# Altium PCB HVPCB_Rev2.PcbDoc
Units mm, origin at the board's own origin, x right, y up, seen from the top; angles counter-clockwise.
Board outline 175 x 100 mm, 2 copper layers (Top Layer, Bottom Layer); 98 components, 54 nets, 242 pads, 147 vias.
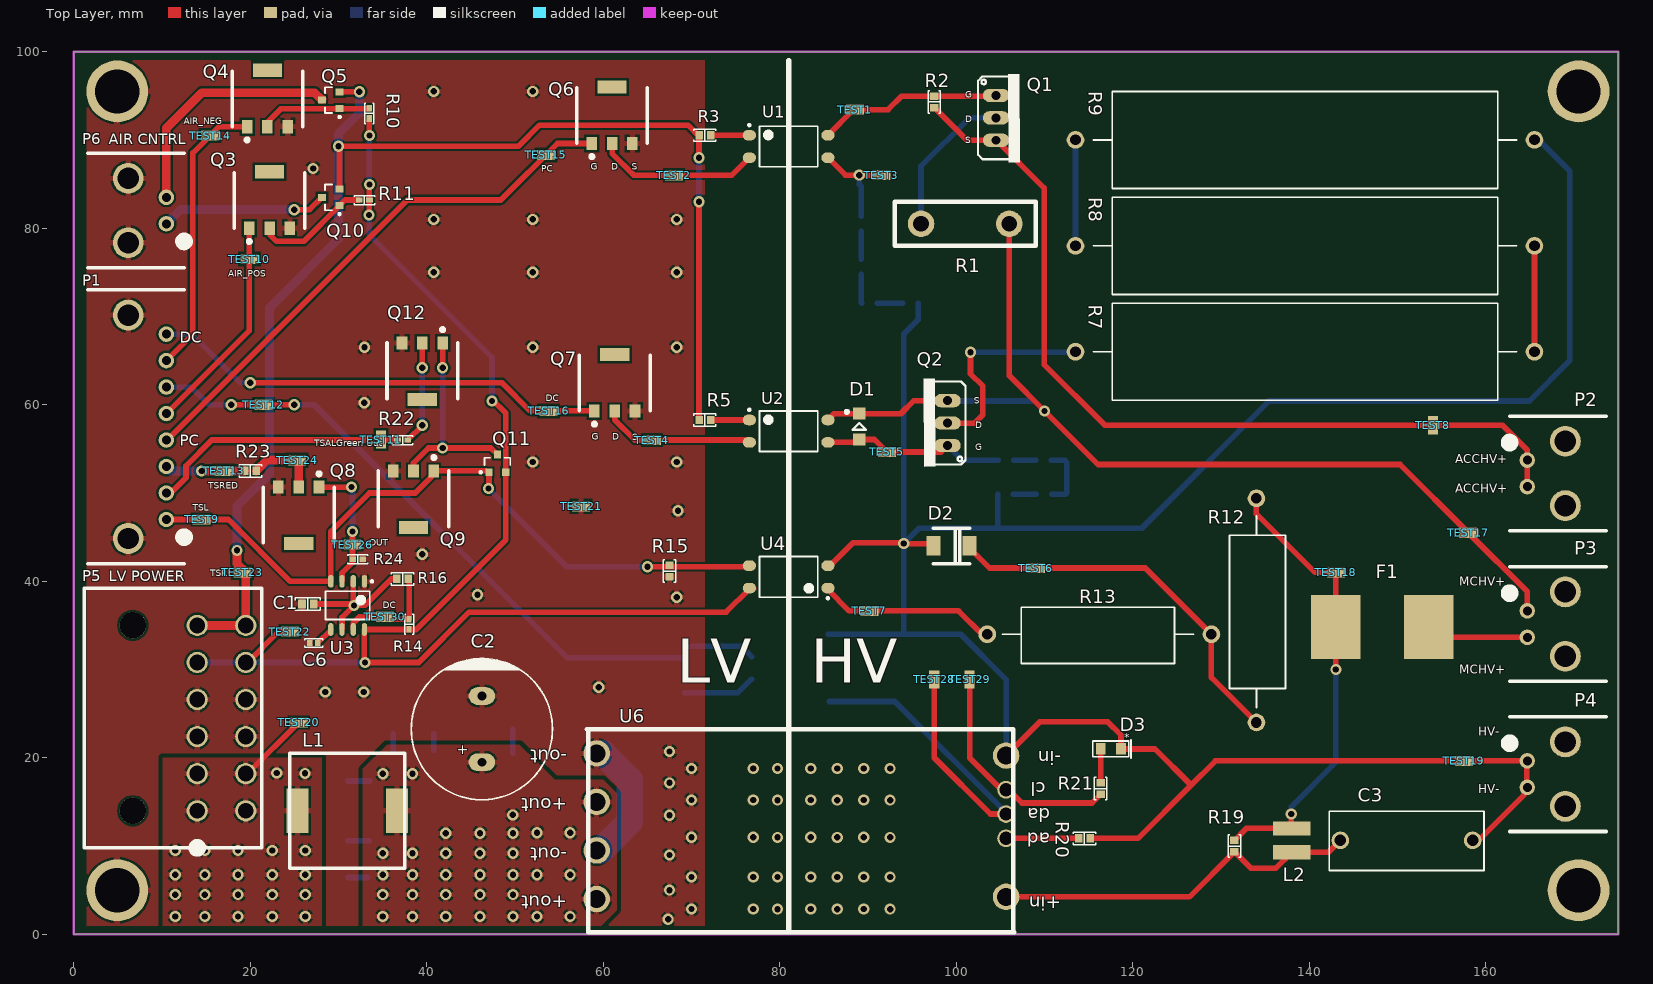
[diagram p0: Top Layer view]
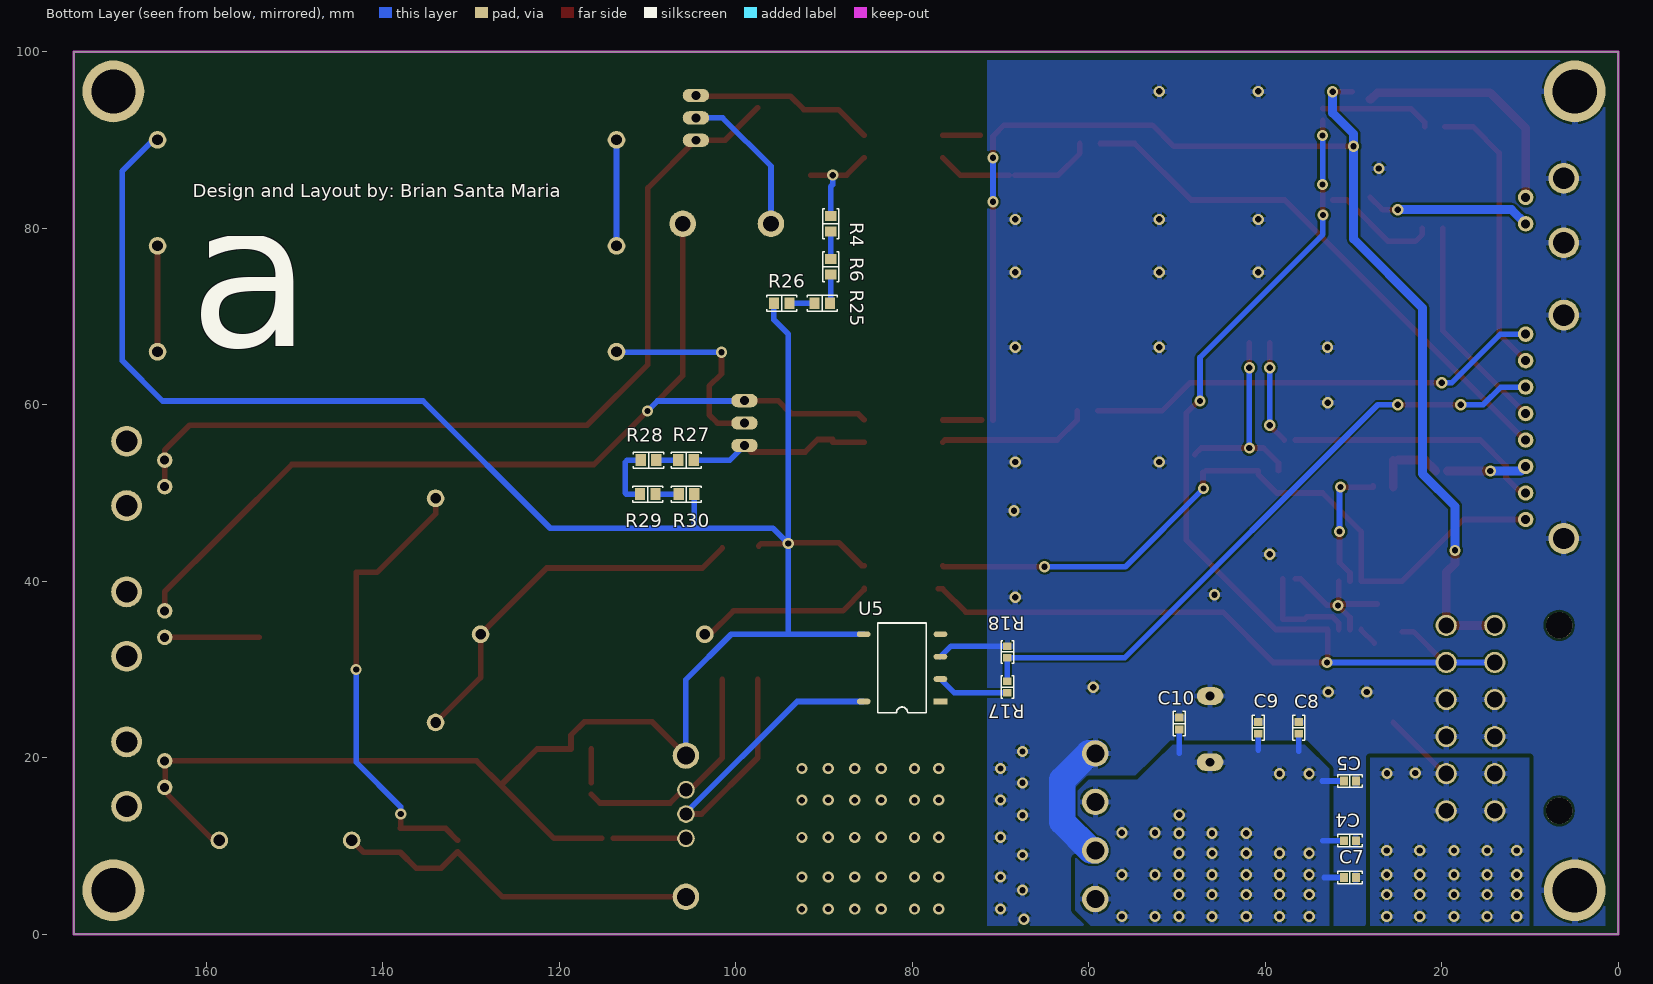
[diagram p1: Bottom Layer view, seen from below]

## Layer stack, top to bottom
Top Solder: solder mask 0.0102, Solder Resist, Dk 3.5
Top Layer: signal copper 0.0356
Dielectric 1: dielectric 0.32, FR-4, Dk 4.8
Bottom Layer: signal copper 0.0356
Bottom Solder: solder mask 0.0102, Solder Resist, Dk 3.5

## Board outline
0,0 175,0 175,100 0,100

## Design rules (kind name [scope] priority, off if disabled: settings)
BoardOutlineClearance [All] p1: gap=0.279 ignorepadtopadclearanceinfootprint=FALSE
Clearance [All] p1: gap=0.254 ignorepadtopadclearanceinfootprint=FALSE except(0.5: Poly-Poly)
HoleSize [All] p1: absolutevalues=TRUE maxlimit=5 minlimit=0.025 maxpercent=80.000 minpercent=20.000
PolygonConnect [All] p1: connectstyle=Relief reliefconductorwidth=0.635 reliefentries=4 polygonreliefangle="90 Angle" airgapwidth=0.254
RoutingVias [All] p1: holewidth=0.711 width=1.27 viastyle="Through Hole" minholewidth=0.711 minwidth=1.27 maxholewidth=0.711 maxwidth=1.27
SolderMaskExpansion [All] p1: expansion=0.102
Width [All] p1: maxlimit=10 minlimit=0.254 preferedwidth=0.635 minimp=50.000000 maximp=50.000000 favimp=50.000000
29 further rules are at their usual default settings.

## Classes and differential pairs
component class Power_Rev2: C2 C3 C4 C5 C7 C8 C9 C10 D3 L1 L2 R17 R18 R19 R20 R21 TEST28 TEST29 U5 U6
component class LV: C1 C6 Q8 Q9 Q11 Q12 R14 R16 R22 R23 R24 TEST24 TEST26 TEST30 U3
component class HVSchematic_Rev2: F1 P1 P2 P3 P4 P5 P6 Q3 Q4 Q5 Q10 R10 R11 TEST8 TEST9 TEST10 TEST11 TEST12 TEST13 TEST14 TEST15 TEST16 TEST17 TEST18 TEST19 TEST20 TEST21 TEST22 TEST23
component class Isolation_Rev2: D1 D2 Q1 Q2 Q6 Q7 R1 R2 R3 R4 R5 R6 R7 R8 R9 R12 R13 R15 R25 R26 R27 R28 R29 R30 TEST1 TEST2 TEST3 TEST4 TEST5 TEST6 TEST7 U1 U2 U4

## Components (designator, comment, footprint, x,y, rotation, side; value= is the part's Value field where it differs from the comment)
C1 "Capacitor MLCC 1.0uf 16V CAP 0603/1608" "CAP 0603/1608" 26.525,37.429 r0 top value=1.0uf
C2 "4700uf" "CAP AL TH D16 L7.5 H16.5" 46.246,23.25 r90 top
C3 "HV Cap" ECW-FD2W684K-TH-CAP 158.5,10.65 r180 top value=.68uf
C4 "Capacitor MLCC 0.47uf 16V CAP 0603/1608" "CAP 0603/1608" 30.403,10.611 r0 bottom value=0.47uf
C5 "Capacitor MLCC 47uf 16V CAP 0603/1608" "CAP 0603/1608" 30.403,17.369 r180 bottom value=47uf
C6 "Capacitor MLCC 0.010uf 16V CAP 0402/1005" "CAP 0402/1005" 27.2,33 r0 top value=0.010uf
C7 "Capacitor MLCC 47uf 16V CAP 0603/1608" "CAP 0603/1608" 30.403,6.442 r180 bottom value=4.7nF
C8 "Capacitor MLCC 47uf 16V CAP 0603/1608" "CAP 0603/1608" 36.2,23.4 r90 bottom value=47pF
C9 "Capacitor MLCC 47uf 16V CAP 0603/1608" "CAP 0603/1608" 40.8,23.4 r90 bottom value=4.7uF
C10 "Capacitor MLCC 47uf 16V CAP 0603/1608" "CAP 0603/1608" 49.746,23.875 r90 bottom value=4.7uF
D1 "DDZ9701-7" SOD123F 89,57.541 r90 top value=14Vz
D2 "SMBJ5370B" SMBJ5370B-TP 97.4,44 r90 top value=56V
D3 "LED" 0805_LED 117.5,21 r0 top value=Red
F1 "Fuse" 0885004.DR 153.5,34.825 r180 top value=4A
L1 "744309033" 744309033 31,14 r180 top value=330nH
L2 "SRR3818A-1R0Y" SRR3818A-1R0Y 138,12 r270 top value=1uH
P1 "2-1445054-8" 2-1445054-8 10.5,47 r270 top
P2 "2-1445054-2" 2-1445054-2 164.68,50.715 r90 top
P3 "2-1445054-2" 2-1445054-2 164.68,33.65 r90 top
P4 "2-1445054-2" 2-1445054-2 164.68,16.65 r90 top
P5 "0039301120" 0039301120 14,35 r270 top value=CONN
P6 "2-1445054-2" 2-1445054-2 10.5,83.5 r270 top
Q1 "FQP3P50" TO-220AB 104.5,92.5 r270 top value=P_Channel
Q2 "FQP3P50" TO-220AB 99,57.922 r90 top value=P_Channel
Q3 "STN3NF06L" STN3NF06L 19.9,80 r0 top value=N_Channel
Q4 "STN3NF06L" STN3NF06L 19.65,91.5 r0 top value=N_Channel
Q5 "PMOS" "SOT-23 (TO-236)" 29.133,94.5 r180 top value=P_Channel
Q6 "STN3NF06L" STN3NF06L 58.7,89.6 r0 top value=N_Channel
Q7 "STN3NF06L" STN3NF06L 59,59.3 r0 top value=N_Channel
Q8 "STN3NF06L" STN3NF06L 27.8,50.669 r180 top value=N_Channel
Q9 "STN3NF06L" STN3NF06L 40.8,52.5 r180 top value=N_Channel
Q10 "PMOS" "SOT-23 (TO-236)" 29.118,83.5 r180 top value=P_Channel
Q11 "PMOS" "SOT-23 (TO-236)" 48,53.35 r90 top value=P_Channel
Q12 "STN3NF06L" STN3NF06L 41.8,67.003 r180 top value=N_Channel
R1 "Resistor 1k2 100W 1% Throughhole" AP101 96,80.5 r0 top value=1.2k
R2 "Resistor 1.0M 0603 1/10W 10%" "RES 0603/1608" 97.5,94.303 r90 top value=1.0M
R3 "Resistor 3.0k 0603 1/10W 1%" "RES 0603/1608" 71.5,90.53 r0 top value=15k
R4 "Resistor 8.2M 0805 1/4W 5%" "RES 0805/2012" 89.224,80.5 r90 bottom value=8.2M
R5 "Resistor 3.0k 0603 1/10W 1%" "RES 0603/1608" 71.5,58.27 r0 top value=15k
R6 "Resistor 8.2M 0805 1/4W 5%" "RES 0805/2012" 89.224,75.625 r90 bottom value=8.2M
R7 "Resistor 1.6k Axial 10W 5%" "Axial 52mm Pitch" 165.5,66 r180 top value=1.6k
R8 "Resistor 1.6k Axial 10W 5%" "Axial 52mm Pitch" 113.5,78 r0 top value=1.6k
R9 "Resistor 1.6k Axial 10W 5%" "Axial 52mm Pitch" 165.5,90 r180 top value=1.6k
R10 "Resistor 1.0 0402 1/10W 1%" "RES 0402/1005" 33.5,93 r270 top value=10k
R11 "Resistor 1.0 0402 1/10W 1%" "RES 0402/1005" 32.943,83.19 r0 top value=10k
R12 "Resistor 2W TH" "Axial 25.4mm Pitch" 134,49.4 r270 top value=44k
R13 "Resistor 2W TH" "Axial 25.4mm Pitch" 128.9,34 r180 top value=60k
R14 "Resistor 1.1 0402 1/10W 1%" "RES 0402/1005" 38,35.141 r270 top value=10k
R15 "Resistor 4.7k 0603 1/10W 5%" "RES 0603/1608" 67.5,41.15 r90 top value=10k
R16 "Resistor 200k 0603 1/10W 1%" "RES 0603/1608" 37.259,40.266 r0 top value=200k
R17 "Resistor 3.0k 0603 1/10W 1%" "RES 0603/1608" 69.223,28 r270 bottom value=15k
R18 "Resistor 4.7k 0603 1/10W 1%" "RES 0603/1608" 69.223,32 r270 bottom value=4.7k
R19 "Resistor 1.0 0603 1/10W 1%" "RES 0603/1608" 131.5,10 r270 top value=1.0
R20 "Resistor 13k 0603 1/10W 1%" "RES 0603/1608" 114.5,10.87 r180 top value=13k
R21 "Resistor 330 0603 1/10W 1%" "RES 0603/1608" 116.35,16.51 r270 top value=330
R22 "Resistor 10k 0402 1/10W 1%" "RES 0402/1005" 37.259,56 r180 top value=10k
R23 "Resistor 1.0 0603 1/10W 1%" "RES 0603/1608" 20.035,52.5 r180 top value=1.0
R24 "Resistor 10k 0402 1/10W 1%" "RES 0402/1005" 32.178,42.5 r180 top value=10k
R25 "Resistor 8.2M 0805 1/4W 5%" "RES 0805/2012" 90.174,71.5 r180 bottom value=8.2M
R26 "Resistor 8.2M 0805 1/4W 5%" "RES 0805/2012" 94.794,71.5 r180 bottom value=8.2M
R27 "Resistor 270k 0805 1/4W 5%" "RES 0805/2012" 105.625,53.731 r180 bottom value=270k
R28 "Resistor 270k 0805 1/4W 5%" "RES 0805/2012" 109.875,53.715 r180 bottom value=270k
R29 "Resistor 270k 0805 1/4W 5%" "RES 0805/2012" 109.95,49.875 r0 bottom value=270k
R30 "Resistor 270k 0805 1/4W 5%" "RES 0805/2012" 105.575,49.875 r0 bottom value=270k
TEST1 "RCU-0C" RCU-0C 88.5,93.428 r90 top value=CONN
TEST2 "" RCU-0C 68,86 r90 top value=CONN
TEST3 "RCU-0C" RCU-0C 91.5,86.01 r90 top value=CONN
TEST4 "RCU-0C" RCU-0C 65.5,56 r90 top value=CONN
TEST5 "RCU-0C" RCU-0C 92.125,54.65 r90 top value=CONN
TEST6 "RCU-0C" RCU-0C 109,41.5 r270 top value=CONN
TEST7 "RCU-0C" RCU-0C 90.15,36.65 r90 top value=CONN
TEST8 "RCU-0C" RCU-0C 154,57.675 r180 top value=CONN
TEST9 "TSL" RCU-0C 14.5,47 r90 top value=CONN
TEST10 "AIR_POS" RCU-0C 19.9,76.5 r270 top value=CONN
TEST11 "TSALGreen Out" RCU-0C 34.816,56.045 r0 top value=CONN
TEST12 "RCU-0C" RCU-0C 21.5,60 r270 top value=CONN
TEST13 "TSRED" RCU-0C 17,52.5 r270 top value=CONN
TEST14 "AIR_NEG" RCU-0C 15.47,90.5 r90 top value=CONN
TEST15 "PC" RCU-0C 53.5,88.3 r90 top value=CONN
TEST16 "DC" RCU-0C 53.8,59.3 r270 top value=CONN
TEST17 "RCU-0C" RCU-0C 158,45.5 r90 top value=CONN
TEST18 "RCU-0C" RCU-0C 143,41 r90 top value=CONN
TEST19 "RCU-0C" RCU-0C 157.5,19.65 r90 top value=CONN
TEST20 "RCU-0C" RCU-0C 25.5,24 r90 top value=CONN
TEST21 "RCU-0C" RCU-0C 57.5,48.5 r90 top value=CONN
TEST22 "RCU-0C" RCU-0C 24.5,34.3 r90 top value=CONN
TEST23 "TSR" RCU-0C 19.125,41.016 r90 top value=CONN
TEST24 "" RCU-0C 25.325,53.715 r90 top value=CONN
TEST26 "OUT" RCU-0C 31.59,44.161 r90 top value=CONN
TEST28 "RCU-0C" RCU-0C 97.5,28.875 r180 top value=CONN
TEST29 "RCU-0C" RCU-0C 101.5,28.875 r180 top value=CONN
TEST30 "DC" RCU-0C 35.255,35.975 r270 top value=CONN
U1 "CPC1393" CPC1393GR 81,89.26 r0 top value=Null
U2 "CPC1393" CPC1393GR 81,57 r0 top value=Null
U3 "LM555 Timer" SOIC-8 31.038,37.266 r270 top
U4 "CPC1393" CPC1393GR 81,40.5 r180 top value=Null
U5 "SSR NC" PLB171P 76.8,26.38 r0 bottom
U6 "DCM290P138T600A40" DCM290P138T600A40 82.44,12.25 r180 top value=Null

## Footprints (in the part's own frame and the unit in brackets; to place one, negate y for a bottom-side part, rotate by r counter-clockwise, add the part's x,y. Pads: shape width x height; smd on the part's side, far side on the other; paste and mask are expansions set on the pad)
2-1445054-2 [mm] "2p through hole connector"
  round 1.75 hole 1.02: 1(3,0) 2(0,0)
  round 3.5 hole 2.41: 3(-2.15,-4.32) 4(5.15,-4.32)
  silkscreen extent -5,-8.92 8,2.5, body extent -5,-8.92 8,2, height 4.37
2-1445054-8 [mm] "8p through hole connector"
  round 1.75 hole 1.02: 1(0,0) 2(-3,0) 3(-6,0) 4(-9,0) 5(-12,0) 6(-15,0) 7(-18,0) 8(-21,0)
  round 3.5 hole 2.41: 9(-23.15,-4.32) 10(2.15,-4.32)
  silkscreen extent -26,-8.92 5,2.5, body extent -26,-8.92 5,0, height 4.37
0805_LED [mm]
  rect 1.1x1.3 smd: 1(-1.15,0) 2(1.15,0)
  silkscreen extent -2.06,-1.02 2.29,1.02, body extent -1.05,-0.67 1.05,0.68, height 0.9
0885004.DR [mm] "4A 450VDC nonreset SMD fuse"
  rect 5.6x7.23 smd: 1(0,0) 2(10.5,0)
0039301120 [mm] "12-pin Molex Minifit Jr"
  round 2.4 hole 1.8: 1(21,0) 2(16.8,0) 3(12.6,0) 4(8.4,0) 5(4.2,0) 6(0,0) 7(21,5.5) 8(16.8,5.5) 9(12.6,5.5) 10(8.4,5.5) 11(4.2,5.5) 12(0,5.5)
  round 3 hole 3 unplated: ""(0,-7.3) ""(21,-7.3)
  silkscreen extent -4.2,-12.8 25.7,7.3
744309033 [mm] "330nH ww inductor"
  rect 2.5x5 smd: 1(-5.625,0) 2(5.625,0)
  silkscreen extent -6.5,-6.5 6.5,6.5
AP101 [mm] "100W Through Hole Resistor"
  round 3 hole 1.8: 1(0,0) 2(10,0)
  silkscreen extent -3,-2.5 13,2.5, body extent -3,-2.5 13,2.5, height 24.5
"Axial 25.4mm Pitch" [mm] "TH 2W resistor family"
  round 2 hole 1.2: 1(0,0) 2(25.4,0)
  silkscreen extent 2,-3.05 23.71,3.3
"Axial 52mm Pitch" [mm]
  round 2 hole 1.2: 1(0,0) 2(52,0)
  silkscreen extent 2,-5.5 50,5.5, body extent 4.19,-5.46 47.88,5.46, height 9.1
"CAP 0402/1005" [mm] "Chip Capacitor, 2-Leads, Body 1.02x0.51mm, IPC Medium Density"
  rect 0.6x0.64 smd: 1(-0.44,0) 2(0.44,0)
  silkscreen extent -1,-0.5 1,0.5, body extent -0.5,-0.26 0.5,0.26, height 0.52
"CAP 0603/1608" [mm] "Chip Capacitor, 2-Leads, Body 1.60x0.80mm, IPC Medium Density"
  rect 0.9x1 smd: 1(-0.675,0) 2(0.675,0)
  silkscreen extent -1.4,-0.7 1.4,0.7, body extent -0.8,-0.41 0.8,0.41, height 0.82
"CAP AL TH D16 L7.5 H16.5" [mm] "16MM Diameter, 7.5MM Lead Spacing Aluminium Capacitor"
  oval 2x3 hole 1: 1(-3.75,0) 2(3.75,0)
  silkscreen extent -8,-8 8,8, body extent -8,-7.99 8,7.99, height 16.7
CPC1393GR [mm] "CPC1393GR, 4-Leads, Body 4.57x6.35mm, Pitch 2.54mm, IPC Medium Density"
  oval 1.5x1.2 smd: 1(-4.45,1.27) 2(-4.45,-1.27) 3(4.45,-1.27) 4(4.45,1.27)
  silkscreen extent -4.57,-2.3 3.3,2.54, body extent -4.76,-2.3 4.76,2.3, height 3.3
DCM290P138T600A40 [mm] "Vicor DC/DC converter"
  round 3 hole 2.03: 1(-23.19,8) 5(-23.19,-8) 6(23.19,8.25) 7(23.19,2.75) 8(23.19,-2.75) 9(23.19,-8.25)
  round 2 hole 1.52: 2(-23.19,1.38) 3(-23.19,-1.38) 4(-23.19,-4.13)
  silkscreen extent -24.15,-11 24.3,12, body extent -24,-11 24,12, height 7.3
ECW-FD2W684K-TH-CAP [mm]
  round 2 hole 1.3: 1(0,0) 2(15,0)
  silkscreen extent -1.27,-3.3 16.26,3.43, body extent -1.35,-3.3 16.35,3.45, height 10
PLB171P [mm]
  rect 1.55x0.65 smd: 1(0,0)
  oval 1.55x0.65 smd: 2(0,-2.54) 3(0,-5.08) 4(0,-7.62) 5(8.7,-7.62) 8(8.7,0)
  silkscreen extent 1.61,-8.89 7.09,1.27
RCU-0C [mm]
  rect 1.15x2.05 smd: 1(0,0)
  body extent -0.6,-0.77 0.6,0.82, height 1.16
"RES 0402/1005" [mm] "Chip Resistor, 2-Leads, Body 1.0x0.5mm, IPC Medium Density"
  rect 0.75x0.6 smd: 1(-0.575,0) 2(0.575,0)
  silkscreen extent -1.14,-0.51 1.14,0.51, body extent -0.5,-0.25 0.5,0.25, height 0.35
"RES 0603/1608" [mm] "Chip Resistor, 2-Leads, Body 1.60x0.80mm, IPC Medium Density"
  rect 0.85x0.95 smd: 1(-0.65,0) 2(0.65,0)
  silkscreen extent -1.27,-0.7 1.27,0.7, body extent -0.8,-0.4 0.8,0.4, height 0.45
"RES 0805/2012" [mm] "Chip Resistor, 2-Leads, Body 2.00x1.25mm, IPC Medium Density"
  rect 1.15x1.35 smd: 1(-0.875,0) 2(0.875,0)
  silkscreen extent -1.7,-0.9 1.7,0.9, body extent -0.95,-0.62 1.05,0.63, height 0.6
SMBJ5370B-TP [mm] "56V zener diode"
  rect 2.2x1.6 smd: 1(0,0) 2(0,-4.1)
  silkscreen extent -2,-4.1 2,0
SOD123F [mm] "SODFL, 2-Leads, Body 1.80x3.50mm, IPC Low Density"
  rect 1.35x1.45 smd: 1(-1.475,0) 2(1.475,0)
  silkscreen extent -0.38,-0.76 1.75,1.5, body extent -1.75,-0.95 1.75,0.95, height 1.15
SOIC-8 [mm] "SOIC, 8-Leads, Body 4.90x3.90mm, Pitch 1.27mm, IPC Medium Density"
  oval 1.45x0.6 smd: 1(-2.725,1.905) 2(-2.725,0.635) 3(-2.725,-0.635) 4(-2.725,-1.905) 5(2.725,-1.905) 6(2.725,-0.635) 7(2.725,0.635) 8(2.725,1.905)
  silkscreen extent -2.85,-2.5 1.6,2.88, body extent -3,-2.5 3,2.5, height 1.75
"SOT-23 (TO-236)" [mm] "TO-92, TO-226, ransistor, MPSA56"
  rect 0.9x0.8 smd: 1(-1,0.95) 2(-1,-0.95) 3(1,0)
  silkscreen extent -1.13,-1.46 0.65,2.02, body extent -0.65,-1.46 0.65,1.46, height 1.11
SRR3818A-1R0Y [mm] "1uH fixed inductor"
  rect 1.6x4.3 smd: 1(0,0) 2(2.7,0)
STN3NF06L [mm] "N-channel Power MOSFET"
  rect 1.2x1.5 smd: 1(0,0) 2(2.3,0) 3(4.6,0)
  rect 3.3x1.5 smd: 4(2.3,6.4)
  silkscreen extent -1.7,-1.7 6.3,6.3
TO-220AB [mm] "TO-220AB, MOSFET, DIODE, BJT"
  oval 1.5x3 hole 1: 1(-2.54,0) 2(0,0) 3(2.54,0)
  silkscreen extent -4.95,-2.03 5.05,2.71, body extent -5.94,-1.75 5.94,2.65, height 19.11

## Part data
C1: library part 229, Dielectric=Ceramic, Manufacturer_id=1, Package="CAP 0603/1608", Voltage_Rating=16V, Created_By="Nick Mah", Created_Date=10/20/2018, Drawer_id=1, idCapacitor=229, Name="Cap_1.0uf_16V_CAP 0603/1608"
C2: library part 1083, Manufacturer_id=1, MfrPartNo=UVZ1E472MHD, Package=TH, Tolerance=20%, Voltage_Rating=25V, ComponentLink1Description=Datasheet, Created_By="Angel Delgado", Drawer_id=1, idCapacitor=1083, Link=https://www.digikey.com/product-detail/en/nichicon/UVZ1E472MHD/493-1308-ND/589049, Name="Cap_4700uf_25V_CAP TH"
C3: library part 1082, Dielectric=Polypropylene, Manufacturer_id=1, MfrPartNo=ECW-FD2W684K, Package=TH, Tolerance=10%, Voltage_Rating=450V, ComponentLink1Description=Datasheet, Created_By="Angel Delgado", Drawer_id=1, idCapacitor=1082, Link=https://www.mouser.com/ProductDetail/Panasonic/ECW-FD2W684K?qs=sGAEpiMZZMsh%252b1woXyUXj8Oz95SkSMnKDNbVTfkAU30%3d, Name="Cap_.68uf_450V_CAP TH"
C4: library part 227, Dielectric=Ceramic, Manufacturer_id=1, Package="CAP 0603/1608", Voltage_Rating=16V, Created_By="Nick Mah", Created_Date=10/20/2018, Drawer_id=1, idCapacitor=227, Name="Cap_0.47uf_16V_CAP 0603/1608"
C5 C7 C8 C9 C10: library part 239, Dielectric=Ceramic, Manufacturer_id=1, Package="CAP 0603/1608", Voltage_Rating=16V, Created_By="Nick Mah", Created_Date=10/20/2018, Drawer_id=1, idCapacitor=239, Name="Cap_47uf_16V_CAP 0603/1608"
C6: library part 97, Dielectric=Ceramic, Manufacturer_id=1, Package="CAP 0402/1005", Voltage_Rating=16V, Created_By="Nick Mah", Created_Date=10/20/2018, Drawer_id=1, idCapacitor=97, Name="Cap_0.010uf_16V_CAP 0402/1005"
D1: library part 10, "Zener Diode 14V 500mW ±5% Surface Mount SOD-123", Manufacturer_id=8, Package=SOD-123, Power=500mW, Supplier1PartNo=DDZ9701-7DICT-ND, ComponentLink1Description=Datasheet, ComponentLink1URL=https://www.diodes.com/assets/Datasheets/ds30410.pdf, Drawer_id=1, idDiode=10, Link=https://www.digikey.com/product-detail/en/diodes-incorporated/DDZ9701-7/DDZ9701-7DICT-ND/3877402, MfrPartNo=DDZ9701-7, Name=DDZ9701, Num_Circuits=1, Supplier1=Digi-Key, Type=Zener
D2: library part 13, "56V Zener Diode", Manufacturer_id=1, Supplier1PartNo=SMBJ5370B-TPMSCT-ND, ComponentLink1Description=Digikey, ComponentLink1URL=https://www.digikey.com/product-detail/en/micro-commercial-co/SMBJ5370B-TP/SMBJ5370B-TPMSCT-ND/3165257, Created_By=Graydon, Drawer_id=1, idDiode=13, Link=https://www.digikey.com/product-detail/en/micro-commercial-co/SMBJ5370B-TP/SMBJ5370B-TPMSCT-ND/3165257, Name=SMBJ5370B-TP, Num_Circuits=1, Supplier1=Digikey, Type=Zener
D3: library part 1, Package=0805, Drawer_id=1, idLED=1, Manufacturer_id=1, Name=LED_0805_RED, Vf=0.7V
F1: library part 7, Manufacturer_id=1, MfrPartNo=0885004.DR, Created_By=Graydon, Created_Date=11/12/2018, Drawer_id=1, I_hold=4A, idFuse=7, Link=https://www.digikey.com/product-detail/en/littelfuse-inc/0885004.DR/F10991CT-ND/8345705, Name=0885004.DR, Pd_Typ=316mW, V_max=450VDC
L1: library part 3, "330nH wirewound inductor", Manufacturer_id=1, Package=Nonstandard, Supplier1PartNo=732-3006-1-ND, Created_By=Graydon, Created_Date=11/12/2018, Drawer_id=1, idInductor=3, Link=https://www.digikey.com/product-detail/en/wurth-electronics-inc/744309033/732-3006-1-ND/2626130, MfrPartNo=744309033, Name=744309033, Supplier1=Digikey
L2: library part 4, "1uH fixed inductor", Manufacturer_id=1, Package=Nonstandard, Supplier1PartNo=652-SRR3818A-1R0Y, ComponentLink1Description=Mouser, ComponentLink1URL=https://www.mouser.com/ProductDetail/Bourns/SRR3818A-1R0Y?qs=EU6FO9ffTwdCQ1wGwZI3iw%3D%3D, Created_By=Graydon, Created_Date=11/12/2018, Drawer_id=1, idInductor=4, Link=https://www.mouser.com/ProductDetail/Bourns/SRR3818A-1R0Y?qs=EU6FO9ffTwdCQ1wGwZI3iw%3D%3D, MfrPartNo=SRR3818A-1R0Y, Name=SRR3818A-1R0Y, Supplier1=Mouser
P1: library part 12, "1x8 connector", Manufacturer_id=5, Supplier1PartNo=2-1445054-8-ND, ComponentLink1Description=Datasheet, Created_By=Graydon, Created_Date=11/10/2018, Drawer_id=1, idConn=12, Link=https://www.digikey.com/product-detail/en/te-connectivity-amp-connectors/2-1445054-8/2-1445054-8-ND/1890093, MfrPartNo=2-1445054-8, Name="Micro MATE-N-LOK 1x8", Num_Contacts=8, Num_Rows=1, Supplier1=Digi-Key
P2 P3 P4 P6: library part 16, "1x2 connector", Manufacturer_id=5, Supplier1PartNo=2-1445054-2-ND, Voltage_Rating=Null, ComponentLink1Description=Digikey, ComponentLink1URL=Null, Created_By=Graydon, Created_Date=11/12/2018, Drawer_id=1, idConn=16, Link=https://www.digikey.com/products/en?keywords=2-1445054-2, MfrPartNo=2-1445054-2, Name="Micro MATE-N-LOK 1x2", Num_Contacts=2, Num_Rows=1, Pitch=Null, Supplier1=Digi-Key, Updated_By=Null
P5: library part 20, "Molex Minifit Jr 12p right angle", Manufacturer_id=1, ComponentLink1Description=Datasheet, ComponentLink1URL=https://www.molex.com/pdm_docs/sd/039301120_sd.pdf, Created_By=Graydon, Created_Date=11/28/2018, Drawer_id=1, idConn=20, Link=https://www.digikey.com/product-detail/en/molex-llc/0039301120/WM1356-ND/561083, MfrPartNo=0039301120, Name="Minifit Jr 12p", Num_Contacts=12, Num_Rows=2, Supplier1=Digi-Key, Supplier1PartNo=https://www.digikey.com/product-detail/en/molex-llc/0039301120/WM1356-ND/561083
Q1 Q2: library part 5, Manufacturer_id=1, Package=TO-220, Power(Max)=85W, Supplier1PartNo=FQP3P50-ND, Created_By=Angel, Drawer_id=1, Id=2.7A, idFETs=5, Link=https://www.digikey.com/product-detail/en/on-semiconductor/FQP3P50/FQP3P50-ND/1055021, MfrPartNo=FQP3P50, Name=FQP3P50, Num_Circuits=1, Rds_On=4Ohms, Supplier1=Digi-Key, Vdss=500V, Vgs(Max)=5.0V, Vgs(typ)=4.0v
Q3 Q4 Q6 Q7 Q8 Q9 Q12: library part 8, "MOSFET N-CH 60V 4A SOT223", Manufacturer_id=1, Package=SOT-233, Power(Max)=3.3W, Supplier1PartNo=497-3177-1-ND, ComponentLink1Description=Datasheet, ComponentLink1URL=https://www.st.com/content/ccc/resource/technical/document/datasheet/b1/52/93/f0/a9/a9/40/d7/CD00002430.pdf/files/CD00002430.pdf/jcr:content/translations/en.CD00002430.pdf, Created_By=Graydon, Created_Date=11/26/2018, Drawer_id=1, Id=4A, idFETs=8, Link=https://www.digikey.com/product-detail/en/stmicroelectronics/STN3NF06L/497-3177-1-ND/654516, MfrPartNo=STN3NF06L, Name=STN3NF06L, Num_Circuits=1, Rds_On=70m, Supplier1=Digkey, Vdss=60V, Vgs(Max)="+/- 16V"
Q5 Q10 Q11: library part 12, "P-Channel 60V 170mA (Ta) 360mW (Ta) Surface Mount SOT-23-3", Manufacturer_id=1, MfrPartNo=BSS84PH6327XTSA2, Package=SOT-23-3, Power(Max)=350mW, Supplier1PartNo=BSS84PH6327XTSA2DKR-ND, Created_By=Angel, Drawer_id=1, Id=170mA, idFETs=12, idFuse=3, Link=https://www.digikey.com/product-detail/en/infineon-technologies/BSS84PH6327XTSA2/BSS84PH6327XTSA2DKR-ND/5413783, Name=BSS84PH6327XTSA2, Num_Circuits=1, Rds_On="8 Ohm", Supplier1=Digi-Key, Vdss=60V, Vgs(Max)=20V, Vgs(typ)=2V
R1: library part 2705, "100W Throughhole Resistor", Manufacturer_id=1, MfrPartNo="AP101 1K2 J", Package=TO-247-2, Power=100W, Supplier Part Number 1=AP1011K2J-ND, Tolerance=5%, ComponentLink1Description=Datasheet, ComponentLink1URL=https://www.ohmite.com/assets/docs/acl_ap101.pdf?r=false, Created_By=Graydon, Created_Date=2018-11-24, Drawer_id=1, idResistor=2705, Link=https://www.digikey.com/short/jvdcjz, Name="AP101 1K2 J", Supplier 1=Digi-Key
R2: library part 2341, Manufacturer_id=1, Package=0603, Power=1/10W, Tolerance=10%, ComponentLink1Description=Datasheet, Created_By="Nick Mah", Created_Date=2018-10-20, Drawer_id=1, idResistor=2341, Name=Res_1.0M_0603_1/10W_10%, Supplier 1=Digi-Key
R3 R5 R17: library part 300, Manufacturer_id=1, Package=0603, Power=1/10W, Tolerance=1%, ComponentLink1Description=Datasheet, Created_By="Nick Mah", Created_Date=2018-10-20, Drawer_id=1, idResistor=300, Name=Res_3.0k_0603_1/10W_1%, Supplier 1=Digi-Key
R4 R6 R25 R26: library part 1895, Manufacturer_id=1, Package=0805, Power=1/4W, Tolerance=5%, ComponentLink1Description=Datasheet, Created_By="Nick Mah", Created_Date=2018-10-20, Drawer_id=1, idResistor=1895, Name=Res_8.2M_0805_1/4W_5%, Supplier 1=Digi-Key
R7 R8 R9: library part 2706, Manufacturer_id=1, MfrPartNo=SQP10AJB-1K6, Package=Axial, Power=10W, Supplier Part Number 1=Digi-Key, Tolerance=5%, ComponentLink1Description=Datasheet, Drawer_id=1, idResistor=2706, Link=https://www.digikey.com/product-detail/en/yageo/SQP10AJB-1K6/1.6KW-10-ND/18787, Name=Res_1.6k_Axial_10W_5%, Supplier 1=Digi-Key
R10 R11: library part 1, Package=0402, Power=1/10W, Tolerance=1%, ComponentLink1Description=Datasheet, Created_By="Nick Mah", Created_Date=2018-10-20, Drawer_id=1, idResistor=1, Manufacturer_id=1, Name=Res_1.0_0402_1/10W_1%, Supplier 1=Digi-Key
R12 R13: library part 2707, "2W TH resistor", Manufacturer_id=1, Package=Axial, Power=2W, Supplier Part Number 1=Digi-Key, Tolerance=5%, ComponentLink1Description=Datasheet, Created_By=Graydon, Created_Date=2018-12-01, Drawer_id=1, idResistor=2707, Link=https://www.digikey.com/product-detail/en/vishay-bc-components/PR02000205101JR500/PPC5.1KW-2CT-ND/597417, Name=PR02
R14: library part 2, Manufacturer_id=1, Package=0402, Power=1/10W, Tolerance=1%, ComponentLink1Description=Datasheet, Created_By="Nick Mah", Created_Date=2018-10-20, Drawer_id=1, idResistor=2, Name=Res_1.1_0402_1/10W_1%, Supplier 1=Digi-Key
R15: library part 1385, Manufacturer_id=1, Package=0603, Power=1/10W, Tolerance=5%, ComponentLink1Description=Datasheet, Created_By="Nick Mah", Created_Date=2018-10-20, Drawer_id=1, idResistor=1385, Name=Res_4.7k_0603_1/10W_5%, Supplier 1=Digi-Key
R16: library part 344, Manufacturer_id=1, Package=0603, Power=1/10W, Tolerance=1%, ComponentLink1Description=Datasheet, Created_By="Nick Mah", Created_Date=2018-10-20, Drawer_id=1, idResistor=344, Name=Res_200k_0603_1/10W_1%, Supplier 1=Digi-Key
R18: library part 305, Manufacturer_id=1, Package=0603, Power=1/10W, Tolerance=1%, ComponentLink1Description=Datasheet, Created_By="Nick Mah", Created_Date=2018-10-20, Drawer_id=1, idResistor=305, Name=Res_4.7k_0603_1/10W_1%, Supplier 1=Digi-Key
R19 R23: library part 217, Manufacturer_id=1, Package=0603, Power=1/10W, Tolerance=1%, ComponentLink1Description=Datasheet, Created_By="Nick Mah", Created_Date=2018-10-20, Drawer_id=1, idResistor=217, Name=Res_1.0_0603_1/10W_1%, Supplier 1=Digi-Key
R20: library part 316, Manufacturer_id=1, Package=0603, Power=1/10W, Tolerance=1%, ComponentLink1Description=Datasheet, Created_By="Nick Mah", Created_Date=2018-10-20, Drawer_id=1, idResistor=316, Name=Res_13k_0603_1/10W_1%, Supplier 1=Digi-Key
R21: library part 277, Manufacturer_id=1, Package=0603, Power=1/10W, Tolerance=1%, ComponentLink1Description=Datasheet, Created_By="Nick Mah", Created_Date=2018-10-20, Drawer_id=1, idResistor=277, Name=Res_330_0603_1/10W_1%, Supplier 1=Digi-Key
R22 R24: library part 97, Manufacturer_id=1, Package=0402, Power=1/10W, Tolerance=1%, ComponentLink1Description=Datasheet, Created_By="Nick Mah", Created_Date=2018-10-20, Drawer_id=1, idResistor=97, Name=Res_10k_0402_1/10W_1%, Supplier 1=Digi-Key
R27 R28 R29 R30: library part 1859, Manufacturer_id=1, Package=0805, Power=1/4W, Tolerance=5%, ComponentLink1Description=Datasheet, Created_By="Nick Mah", Created_Date=2018-10-20, Drawer_id=1, idResistor=1859, Name=Res_270k_0805_1/4W_5%, Supplier 1=Digi-Key
TEST1 TEST3 TEST4 TEST5 TEST6 TEST7 TEST8 TEST12 TEST17 TEST18 TEST19 TEST20 TEST21 TEST22 TEST28 TEST29: library part 14, "Test point", Manufacturer_id=1, Supplier1PartNo=None, ComponentLink1Description=Null, ComponentLink1URL=Null, Created_By=Graydon, Created_Date=11/10/2018, Drawer_id=1, idConn=14, Link=https://www.digikey.com/product-detail/en/te-connectivity-amp-connectors/RCU-0C/A106145CT-ND/3477802, MfrPartNo=RCU-0C, Name=RCU-0C, Num_Contacts=1, Num_Rows=1, Package=RCU-0C, Supplier1=None, Updated_By=Null
TEST2 TEST9 TEST10 TEST11 TEST13 TEST14 TEST15 TEST16 TEST23 TEST24 TEST26 TEST30: library part 14, "Test point", Manufacturer_id=1, MfrPartNo=RCU-0C, Supplier1PartNo=None, ComponentLink1Description=Null, ComponentLink1URL=Null, Created_By=Graydon, Created_Date=11/10/2018, Drawer_id=1, idConn=14, Link=https://www.digikey.com/product-detail/en/te-connectivity-amp-connectors/RCU-0C/A106145CT-ND/3477802, Name=RCU-0C, Num_Contacts=1, Num_Rows=1, Package=RCU-0C, Supplier1=None, Updated_By=Null
U1 U2 U4: library part 26, "Solid State Relay SPST-NO (1 Form A) 4-SMD (0.300\", 7.62mm)", Manufacturer_id=1, MfrPartNo=CPC1393GRTR, Package=CPC1393GR, Supplier1PartNo=Null, ComponentLink1Description=Null, ComponentLink1URL=Null, Created_By=Lynette, Data_Rate=Null, Drawer_id=1, idIC_Misc=26, Link=https://www.digikey.com/product-detail/en/ixys-integrated-circuits-division/CPC1393GRTR/CLA270CT-ND/1277144, Name=CPC1393, Num_Circuits=1, Protocol=Null, Supplier1=Null, Type=Null, Updated_By=Null, Vin(Max)=Null, Vin(Min)=Null
U3: library part 17, Manufacturer_id=1, Drawer_id=1, idIC_Misc=17, Name="LM555 Timer"
U5: library part 34, "Optoisolator: solid state relay, normally closed", Manufacturer_id=1, MfrPartNo=PLB171P, Supplier1PartNo=PLB171P-ND, ComponentLink1Description=Digikey, ComponentLink1URL=https://www.digikey.com/product-detail/en/ixys-integrated-circuits-division/PLB171P/PLB171P-ND/5887143, Created_By=gray, Created_Date=3/8/2019, Drawer_id=1, idIC_Misc=34, Link=https://www.digikey.com/product-detail/en/ixys-integrated-circuits-division/PLB171P/PLB171P-ND/5887143, Name=PLB171, Num_Circuits=1, Package=PLB171P, Supplier1=Digikey, Type=Optoisolator
U6: library part 24, "Vicor DC/DC converter", Manufacturer_id=1, Supplier1PartNo=1102-5388-ND, Created_By=Graydon, Data_Rate=Null, Drawer_id=1, idIC_Misc=24, Link=http://www.vicorpower.com/documents/datasheets/ds_DCM290y138x600A40.pdf, MfrPartNo=DCM290P138T600A40, Name=DCM290P138T600A40, Num_Circuits=1, Protocol=Null, Supplier1=Digikey, Type=Null, Vin(Max)=Null, Vin(Min)=Null

## Free pads (board coordinates)
  round 7 hole 5: 4(4.938,5) 4(4.938,95.5) 4(170.5,5) 4(170.5,95.5)

## Via types
v1: diameter 1.27, hole 0.711, Top Layer to Bottom Layer, 147 vias

## Nets (pads, with @x,y where several pads share a name; then routed paths per layer and width w, separated by ;. In a path a pad name is that pad's centre, name@x,y a point inside that pad or via, vN(x,y) a via of type N, cw(c..) or ccw(c..) an arc to the next point about the centre after c; other vN are vias at no path point)
+12V: P5.5 P5.11 Q11.2 R10.2 R11.2 R14.2 TEST22.1 U3.8 U4.4 | length 151.4
  Top Layer w0.635: P5.11 19.719,30.8 23.219,34.3 TEST22.1 ; v1@32.943,30.8 U3.8 38.816,34.541 48.95,44.675 Q11.2 48.971,52.372 48.971,59.029 47.397,60.603 v1(47.397,60.421) ; v1(33,30.8) 39.1,30.8 44.8,36.5 73.92,36.5 76.55,39.13 U4.4@77.05,39.13 ; v1(33.468,81.5) 33.468,83.152 33.506,83.19 v1(33.506,84.954) ; R10.2@33.504,92.2 33.506,92.198 v1(33.506,90.494)
  Bottom Layer w0.635: P5.5 P5.11 19.7,31 19.9,30.8 v1(33,30.8) ; v1(33.468,81.5) 33.468,79.282 47.397,65.353 v1(47.397,60.421) ; v1(33.506,84.954) v1(33.506,90.494)
+12V_Out: L1.2 P5.1 P5.2 P5.7 P5.8 TEST20.1 | length 8.4
  Top Layer w0.635: P5.8 19.7,18.2 TEST20.1
  other v1: 11.498,2.024 14.864,2.024 18.623,2.024 22.496,2.024 26.246,2.024 11.498,4.5 14.864,4.5 18.623,4.5 22.496,4.5 26.246,4.5 11.5,6.759 14.866,6.759 18.616,6.759 22.5,6.759 26.248,6.759 11.5,9.5 14.866,9.5 18.616,9.5 22.5,9.5 26.248,9.5 26.2,18.235 23,18.278
ACCHV+: P2.1 P2.2 Q1.3 R2.1 TEST8.1 | length 99.1
  Top Layer w0.635: R2.1 101.194,89.96 Q1.3 104.54,89.96 109.95,84.55 109.95,64.55 116.825,57.675 TEST8.1 161.878,57.675 164.68,54.873 P2.1 P2.2
AIR_NEG: P1.7 Q4.1 TEST14.1 | length 32.2
  Top Layer w0.635: P1.7 13.5,68 13.5,88.53 16.47,91.5 Q4.1
AIR_POS: P1.5 Q3.1 TEST10.1 | length 24.9
  Top Layer w0.635: P1.5 19.9,68.4 19.9,71.5 Q3.1
DCDCEnIso: TEST28.1 U5.8 U6.3 | length 45.6
  Top Layer w0.635: TEST28.1 97.5,20 103.87,13.63 U6.3
  Bottom Layer w0.635: U5.8@85.6,26.38 93.02,26.38 105.664,13.736 U6.3@105.664,13.081
GND: C1.1 C2.2 C4.1 C5.2 C6.1 C7.2 C8.2 C9.2 C10.2 P1.9 P1.10 P5.3 P5.4 P5.9 P5.10 P6.3 P6.4 pad.4@4.938,5 pad.4@4.938,95.5 Q3.3 Q4.3 Q6.3 Q7.3 Q8.3 Q9.3 Q12.3 R15.1 R18.1 R24.1 TEST21.1 U3.1 U5.3 U6.7 U6.9 | length 22.9
  Bottom Layer w0.635: R18.1 75.61,32.65 U5.3
  Bottom Layer w3: U6.7 59.75,9.5 63,12.75 63,17.5 60,20.5 U6.9
  other v1: 67.35,1.709 70,2.87 67.5,5.009 70,6.5 67.5,9 70,11 67.5,13.5 70,15.218 67.5,17.16 70,18.798 67.5,20.718 28.505,27.45 32.871,27.45 59.5,28 68.331,38.2 45.746,38.479 39.5,43.05 68.473,48 52,53.5 68.333,53.5 32.923,60.223 32.943,66.5 52,66.5 68.333,66.5 40.8,75 52,75 68.333,75 40.8,81 52,81 68.333,81 27.13,86.769 40.8,95.5 52,95.5
HV-: C3.1 D2.1 D3.2 P4.1 P4.2 R9.1 R20.1 R26.1 R30.1 TEST19.1 U4.2 U5.5 U6.5 | length 288.5
  Top Layer w0.635: U4.2 85.72,41.77 88.319,44.369 93.94,44.369 v1(94.04,44.269) 97.131,44.269 D2.1 ; U6.5@105.727,20.347 109.455,24.075 117.15,24.075 118.65,22.575 D3.2 122.5,21 126.5,17 126.5,16.8 ; R20.1 120.57,10.87 126.5,16.8 ; C3.1 159.15,10.65 164.35,15.85 164.35,16.32 164.628,16.598 164.628,19.65 TEST19.1 129.35,19.65 126.5,16.8
  Bottom Layer w0.635: U5.5 94.04,34 ; R26.1 95.669,69.629 94.04,68 v1(94.04,44.269) ; R30.1 104.7,46.05 104.75,46 ; U6.5 105.664,20.284 105.664,28.836 100.5,34 94.04,34 ; R9.1 165.98,90 169.5,86.48 169.5,65 164.921,60.421 135.421,60.421 121,46 104.75,46 ; 94.04,34 v1(94.04,44.269) ; v1(94.04,44.269) 95.771,46 104.75,46
MCHV+: D1.2 P3.1 Q2.3 R1.2 TEST17.1 U2.4 | length 114.4
  Top Layer w0.635: U2.4@85.45,58.293 86.132,58.975 93.703,58.975 95.19,60.462 Q2.3 ; R1.2 106.5,80.5 106,80 106,63.291 v1(110,59.291) 116.068,53.223 150.277,53.223 TEST17.1 164.68,38.82 P3.1
  Bottom Layer w0.635: Q2.3 Q2.3@99,60.539 ; Q2.3@99.553,60.592 99.724,60.421 108.87,60.421 v1(110,59.291)
MCHV+_Fsd: F1.2 L2.1 R12.1 R19.1 TEST18.1 | length 51.7
  Top Layer w0.635: R19.1 132.85,12 L2.1 137.95,12.05 v1(137.95,13.63) ; R12.1 134,47.633 140.633,41 TEST18.1 F1.2 v1(143,30)
  Bottom Layer w0.635: v1(137.95,13.63) 137.95,14.46 143,19.51 v1(143,30)
NetC1_2: C1.2 R16.1 U3.2 U3.6 | length 16.5
  Top Layer w0.635: C1.2@27.325,37.429 v1@31.59,37.429 ; U3.6 30.403,35.916 v1(31.753,37.266) ; U3.2 31.673,37.512 v1@31.59,37.429 ; R16.1 35.975,40.266 32.975,37.266 v1(31.753,37.266) ; v1@31.59,37.429 v1(31.753,37.266)
NetC2_1: C2.1 C4.2 C5.1 C7.1 C8.1 C9.1 C10.1 L1.1 U6.6 U6.8 | length 13.7
  Bottom Layer w0.635: C7.1 33.337,6.442 ; C4.2 33.48,10.611 ; C5.1 33.538,17.369 ; 36.2,20.722 C8.1 ; 40.8,20.886 C9.1 ; 49.746,20.5 C10.1@49.746,23.25
  other v1: 35.028,2.024 38.394,2.024 42.153,2.024 46.026,2.024 49.776,2.024 52.5,2.024 56.248,2.024 35.028,4.5 38.394,4.5 42.153,4.5 46.026,4.5 49.776,4.5 35.03,6.759 38.396,6.759 42.146,6.759 46.03,6.759 49.778,6.759 52.5,6.759 56.248,6.759 35.03,9.183 38.396,9.183 42.146,9.183 46.019,9.183 49.769,9.183 42.157,11.442 46.03,11.442 49.771,11.442 52.5,11.5 56.248,11.5 49.746,13.535 35.03,18.2 38.396,18.2
NetC3_2: C3.2 L2.2 R19.2 U6.1 | length 42.1
  Top Layer w0.635: U6.1 126.4,4.25 R19.2 133.35,7.5 136.2,7.5 L2.2 142.15,9.3 C3.2
NetC6_2: C6.2 U3.5 | length 2.2
  Top Layer w0.635: C6.2 29.133,34.493 U3.5
NetD1_1: D1.1 Q2.1 R27.2 TEST5.1 U2.3 | length 20.9
  Top Layer w0.635: U2.3 D1.1@89,55.73 ; D1.1 90.709,56.066 TEST5.1 98.268,54.65 Q2.1
  Bottom Layer w0.635: Q2.1 100.651,53.731 R27.2
NetD2_2: D2.2 R12.2 R13.1 TEST6.1 | length 43.6
  Top Layer w0.635: D2.2@101.5,43.769 103.769,41.5 121.4,41.5 R13.1 128.9,29.1 R12.2
NetD3_1: D3.1 R21.1 | length 3.8
  Top Layer w0.635: R21.1 D3.1
NetF1_1: F1.1 P3.2 | length 10.7
  Top Layer w0.635: F1.1@154,33.65 P3.2
NetP1_1: P1.1 Q9.1 Q11.1 R15.2 TEST9.1 U3.4 U4.3 | length 83
  Top Layer w0.635: P1.1 TEST9.1 17.533,47 24.542,39.991 U3.4 29.133,45.633 33.5,50 38.7,50 40.8,52.1 Q9.1 Q11.1@46.75,52.5 ; v1@47.05,50.5 Q11.1 ; v1(65,41.65) 76.43,41.65 U4.3
  Bottom Layer w0.635: v1(47,50.5) 55.85,41.65 v1(65,41.65)
NetP1_2: P1.2 R22.2 TEST11.1 | length 29.4
  Top Layer w0.635: P1.2 11,50 12.73,51.73 12.73,53.08 15.65,56 R22.2@36.609,56
NetP1_3: P1.3 R23.2 TEST13.1 | length 9.1
  Top Layer w1: v1(14.5,52.5) TEST13.1 R23.2
  Bottom Layer w0.635: v1@14.059,52.5 v1(14.5,52.5)
  Bottom Layer w1: P1.3 11,52.5 v1@14.059,52.5
NetP1_4: P1.4 Q6.1 TEST15.1 | length 62.1
  Top Layer w0.635: P1.4 10.6,56 18.794,64.194 37.79,83.19 48.39,83.19 54.8,89.6 Q6.1
NetP1_6: P1.6 R17.1 R18.2 TEST12.1 | length 74
  Top Layer w0.635: v1(17.845,60) 19.045,60 ; 19.125,60 TEST12.1 v1(25,60)
  Bottom Layer w0.635: P1.6 13.312,62 15.312,60 v1(17.845,60) ; v1(25,60) 27.254,60 55.904,31.35 R18.2 R17.1
NetP1_8: P1.8 Q7.1 TEST16.1 | length 52.1
  Top Layer w0.635: v1(20,62.5) 48.5,62.5 51.7,59.3 TEST16.1 Q7.1
  Bottom Layer w0.635: P1.8 13.359,68 18.859,62.5 v1(20,62.5)
NetP5_6: P5.6 P5.12 Q5.2 Q10.2 R3.1 R5.1 TEST23.1 | length 153.7
  Top Layer w0.635: Q10.2 30.118,89.169 v1(30,89.288) 50.393,89.288 52.785,91.68 69.588,91.68 70.85,90.418 v1(70.85,87.98) ; Q5.2 v1(32.368,95.45) ; R5.1 v1(70.85,83)
  Top Layer w1: P5.6 P5.12 19.5,41 18.5,42 v1(18.5,43.5)
  Bottom Layer w0.635: v1(70.85,83) v1(70.85,87.98)
  Bottom Layer w1: v1(18.5,43.5) 18.5,48.5 22.2,52.2 22.2,70.982 30,78.782 v1(30,89.288) 30,90.68 32.368,93.048 v1(32.368,95.45)
NetP6_1: P6.1 Q10.3 | length 18.9
  Top Layer w0.635: v1(25,82.1) 26.718,82.1 Q10.3
  Bottom Layer w1: P6.1 12.1,82.1 v1(25,82.1)
NetP6_2: P6.2 Q5.3 | length 27.4
  Top Layer w1: P6.2 10.5,91.339 14.515,95.353 27.28,95.353 28.033,94.6 Q5.3@28.133,94.6
NetQ1_1: Q1.1 R2.2 TEST1.1 U1.4 | length 20.9
  Top Layer w0.635: U1.4 88.348,93.428 TEST1.1 92.268,93.428 93.794,94.953 R2.2 104.413,94.953 Q1.1
NetQ1_2: Q1.2 R1.1 | length 17.3
  Bottom Layer w0.635: R1.1 96,87.03 101.47,92.5 Q1.2
NetQ2_2: Q2.2 R7.2 | length 23.9
  Top Layer w0.635: Q2.2 102.055,57.922 103,58.867 103,62.11 101.61,63.5 v1(101.61,65.936)
  Bottom Layer w0.635: v1(101.61,65.936) R7.2@113.5,65.936
NetQ3_2: Q3.2 Q10.1 R11.1 | length 13.1
  Top Layer w0.635: Q3.2 22.2,79.3 23,78.5 26.068,78.5 Q10.1 30.758,83.19 R11.1
NetQ4_2: Q4.2 Q5.1 R10.1 | length 12.7
  Top Layer w0.635: Q4.2 21.95,92 23.479,93.528 30.111,93.528 Q5.1 33.475,93.55 R10.1
NetQ6_2: Q6.2 TEST2.1 U1.2 | length 17.9
  Top Layer w0.635: Q6.2 61,88.468 63.468,86 TEST2.1@68.393,86 ; TEST2.1@69,86.01 74.57,86.01 U1.2
NetQ7_2: Q7.2 TEST4.1 U2.2 | length 17.3
  Top Layer w0.635: Q7.2 61.3,58.289 63.589,56 TEST4.1 76.28,56 U2.2
NetQ8_1: Q8.1 R24.2 TEST26.1 U3.3 | length 15
  Top Layer w0.635: Q8.1@27.8,50.8 Q8.1 v1(31.475,50.669) ; U3.3 30.403,40.941 31.59,42.128 TEST26.1 v1(31.59,45.633)
  Bottom Layer w0.635: v1(31.475,50.669) 31.59,50.554 v1(31.59,45.633)
NetQ8_2: Q8.2 R23.1 TEST24.1 | length 7.9
  Top Layer w1: R23.1 21.908,53.723 TEST24.1@25,53.723 ; Q8.2 TEST24.1@25.5,53.715
NetQ9_2: Q9.2 Q11.3 Q12.1 | length 23.4
  Top Layer w0.635: Q9.2 38.5,53.4 40.2,55.1 v1(41.8,55.1) 47.25,55.1 Q11.3 ; v1(41.8,64.194) Q12.1@41.8,67
  Bottom Layer w0.635: v1(41.8,55.1) v1(41.8,64.194) v1@41.8,64.3
NetQ12_2: Q12.2 R22.1 | length 11.7
  Top Layer w0.635: R22.1 v1(39.5,57.666) ; v1(39.5,64.194) Q12.2
  Bottom Layer w0.635: v1(39.5,57.666) v1(39.5,64.194)
NetR3_2: R3.2 U1.1 | length 4.2
  Top Layer w0.635: R3.2@72.3,90.53 U1.1
NetR4_1: R4.1 R6.2 | length 3.1
  Bottom Layer w0.635: R6.2 R4.1
NetR4_2: R4.2 TEST3.1 U1.3 | length 11.6
  Top Layer w0.635: U1.3 87.43,86.01 v1(89,86.01) TEST3.1
  Bottom Layer w0.635: v1(89,86.01) 89,84.938 89.224,84.714 R4.2
NetR5_2: R5.2 U2.1 | length 4.4
  Top Layer w0.635: R5.2 U2.1
NetR6_1: R6.1 R25.2 | length 3.3
  Bottom Layer w0.635: R6.1 89.224,71.575 R25.2
NetR7_1: R7.1 R8.2 | length 12
  Top Layer w0.635: R7.1 R8.2
NetR8_1: R8.1 R9.2 | length 12
  Bottom Layer w0.635: R8.1 R9.2
NetR13_2: R13.2 TEST7.1 U4.1 | length 20.3
  Top Layer w0.635: U4.1 85.45,39.05 87.85,36.65 100.25,36.65 102.9,34 R13.2
NetR14_1: R14.1 R16.2 TEST30.1 U3.7 | length 12
  Top Layer w0.635: U3.7 31.673,35.28 32.368,35.975 TEST30.1 35.514,35.716 R14.1 R16.2@38,40.266
NetR17_2: R17.2 U5.2 | length 8.2
  Bottom Layer w0.635: R17.2 75.23,27.35 U5.2
NetR20_2: R20.2 U6.2 | length 8.2
  Top Layer w0.635: U6.2 R20.2
NetR21_2: R21.2 TEST29.1 U6.4 | length 25.4
  Top Layer w0.635: TEST29.1 101.5,20 105.12,16.38 U6.4 ; U6.4@106.301,16.004 107.425,14.88 115.37,14.88 R21.2
NetR25_1: R25.1 R26.2 | length 2.9
  Bottom Layer w0.635: R25.1 R26.2
NetR27_1: R27.1 R28.2 | length 2.5
  Bottom Layer w0.635: R27.1 108.984,53.731 R28.2
NetR28_1: R28.1 R29.2 | length 7.1
  Bottom Layer w0.635: R28.1 112.285,53.715 112.5,53.5 112.5,50 112.375,49.875 R29.2
NetR29_1: R29.1 R30.2 | length 2.6
  Bottom Layer w0.635: R30.2 R29.1
pads on no net: P2.3 P2.4 P3.3 P3.4 P4.3 P4.4 P5. Q3.4 Q4.4 Q6.4 Q7.4 Q8.4 Q9.4 Q12.4 U5.1 U5.4
copper on no net:
  other v1: 79.75,2.855 86.5,2.855 92.5,2.855 77,2.87 83.5,2.87 89.5,2.87 79.75,6.485 86.5,6.485 92.5,6.485 77,6.5 83.5,6.5 89.5,6.5 79.75,10.985 86.5,10.985 92.5,10.985 77,11 83.5,11 89.5,11 77,15.218 79.75,15.204 83.5,15.218 86.5,15.204 89.5,15.218 92.5,15.204 79.75,18.783 86.5,18.783 92.5,18.783 77,18.798 83.5,18.798 89.5,18.798

## Polygon pours and split planes (outlines as drawn)
GND on Top Layer "Top Layer-GND" (solid, pour order 51): 1.5,1 71.5,1 71.5,99 1.5,99
+12V_Out on Top Layer "Top Layer-+12V_Out" (solid, pour order 24): 22,20 10.068,20 10.068,1 28.118,1 28.118,20
NetC2_1 on Top Layer "Top Layer-NetC2_1" (solid, pour order 41): 32.753,18.753 35.5,21.5 50.5,21.5 52.5,19.5 54.5,17.5 60,17.5 61.5,16 61.5,2.75 59.75,1 32.753,1
GND on Bottom Layer "NONET_L02_P052" (solid, pour order 52): 1.5,1 71.5,1 71.5,99 1.5,99
+12V_Out on Bottom Layer "Bottom Layer-+12V_Out" (solid, pour order 26): 10.068,20 22,20 28.118,20 28.118,1 10.068,1
NetC2_1 on Bottom Layer "Bottom Layer-NetC2_1" (solid, pour order 45): 32.753,18.753 35.5,21.5 50.5,21.5 52.5,19.5 54.5,17.5 60,17.5 61.5,16 61.5,2.75 59.75,1 32.753,1
no net on Bottom Solder "Top Solder-DC/DC" (solid): 75.5,21.479 94.44,21.479 94.44,1 75.5,1
no net on Bottom Solder "Bottom Solder-C2_1" (solid, pour order 49): 32.753,18.753 35.5,21.5 50.5,21.5 52.5,19.5 54.5,17.5 60,17.5 61.5,16 61.5,2.75 59.75,1 32.753,1
no net on Bottom Solder "Bottom Solder-+12V_Out" (solid, pour order 35): 22,20 10.068,20 10.068,1 28.118,1 28.118,20
no net on Top Solder "Top Solder-DC/DC" (solid): 75.5,21.5 94.44,21.5 94.44,1 75.5,1
no net on Top Solder "Top Solder-C2_1" (solid, pour order 47): 32.753,18.753 35.5,21.5 50.5,21.5 52.5,19.5 54.5,17.5 60,17.5 61.5,16 61.5,2.75 59.75,1 32.753,1
no net on Top Solder "Top Solder- +12V_Out" (solid, pour order 34): 22,20 10.068,20 10.068,1 28.118,1 28.118,20

## Keep-outs
Keep-Out Layer:
  the board outline again, w0.254

## Silkscreen, mask and mechanical layers (free items; w line width, h text height)
Top Overlay:
  lines w0.6: 81,0.5 81,99
  text "G" at 101,94.778 h0.75
  text "D" at 101,92 h0.75
  text "S" at 101,89.6 h0.75
  text "AIR CNTRL" at 4,89.5 h1.2
  text "G" at 58.6,86.645 h0.75
  text "D" at 60.9,86.645 h0.75
  text "S" at 63.2,86.6 h0.75
  text "DC" at 12,67 h1.25
  text "S" at 102.633,60.843 h0.75 r180
  text "D" at 102.133,57.343 h0.75
  text "G" at 58.7,56.045 h0.75
  text "D" at 61,56.045 h0.75
  text "S" at 63.3,56 h0.75
  text "PC" at 12,55.341 h1.25
  text "G" at 102.133,54.843 h0.75
  text "ACCHV+" at 156.5,53.35 h1
  text "ACCHV+" at 156.5,50 h1
  text "LV POWER" at 4,39.991 h1.2
  text "MCHV+" at 157,39.5 h1
  text "MCHV+" at 157,29.5 h1
  text "LV" at 68.333,28.5 h5
  text "HV" at 83.5,28.5 h5
  text "HV-" at 159.15,22.5 h1
  text "HV-" at 159.15,16 h1
Bottom Overlay:
  text "Design and Layout by: Brian Santa Maria" at 161.5,83.5 h1.5
  text "a" at 161.878,60 h35

## Text inside footprints (layer, text, board x,y; h text height)
C2: Top Overlay "+" at 44.996,20.25 h2 r90
D3: Top Overlay "*" at 119.024,21.508 h1.52
U6: Top Overlay "-in" at 111.904,20.759 h1.52 r180; Top Overlay "cl" at 110.126,17.203 h1.52 r180; Top Overlay "ad" at 110.634,11.488 h1.52 r180; Top Overlay "+in" at 111.904,4.25 h1.52 r180; Top Overlay "da" at 110.634,14.282 h1.52 r180; Top Overlay "-out" at 55.897,9.837 h1.52 r180; Top Overlay "-out" at 55.897,20.886 h1.52 r180; Top Overlay "+out" at 55.897,15.425 h1.52 r180; Top Overlay "+out" at 55.897,4.376 h1.52 r180